# EAGLE board esquema_synesthesia (EAGLE 8.1.0)

Size 160 x 100 mm. Coordinates in mm from the lower left corner, seen from the top.
Outline: 0,0 160,0 160,100 0,100 0,0
Copper layers (1*16): Top 0.035mm / dielectric 1.5mm / Bottom 0.035mm
Design rules "default": minimum track width 10mil, minimum drill 24mil, track to track 8mil, track to pad 8mil, pad to pad 8mil, via to via 8mil, smd to smd 8mil, copper to edge 40mil, drill to drill 8mil, minimum pad ring 10mil, minimum via ring 8mil, stop-mask expansion 4mil, vias tented up to drill 0mil, thermal gap 10mil

## Footprints (pad centres in the part's own frame; a part is rotated, then mirrored left to right if it is on the bottom)
BT_BOARD_FOOTPRINT = drill 0.9 pad 1.778: GND -16.51,-1.27; RX -16.51,3.81; TX -16.51,1.27; VCC -16.51,-3.81
HC-SR04_FOOTPRINT = drill 0.9 pad 1.778: ECHO 0,1.27; TRIG 0,-1.27; VCC 0,-3.81 | drill 0.9 pad 1.778 square: GND 0,3.81
TACTILE_SWITCH_PTH_6.0MM = drill 1.016 pad 1.88: 1 -3.251,2.261; 2 3.251,2.261; 3 -3.251,-2.261; 4 3.251,-2.261
PRO-MINI = drill 0.8 long: A0 8.89,8.89; A1 8.89,11.43; A2 8.89,13.97; A3 8.89,16.51; A4 -2.54,-1.27; A5 0,-1.27; A6 2.54,-1.27; A7 5.08,-1.27; D2 -6.35,16.51; D3 -6.35,13.97; D4 -6.35,11.43; D5 -6.35,8.89; D6 -6.35,6.35; D7 -6.35,3.81; D8 -6.35,1.27; D9 -6.35,-1.27; D10 8.89,-1.27; D11 8.89,1.27; D12 8.89,3.81; D13 8.89,6.35; DTR 7.62,29.21; GND 8.89,24.13; GND1 -6.35,19.05; GND2 -5.08,29.21; GND3 -2.54,29.21; RAW 8.89,26.67; RST 8.89,21.59; RST1 -6.35,21.59; RX1 -6.35,24.13; RX1-1 2.54,29.21; TX0 -6.35,26.67; TX0-1 5.08,29.21; VCC 8.89,19.05; VCC1 0,29.21

## Placement (x,y rotation side)
J_BT_BOARD_1  BLUETOOTH_BOARD  [BT_BOARD_FOOTPRINT]  -30.48,43.18 0 top  (outside the outline)
J_ULTRASONIC_1  HC-SR04  [HC-SR04_FOOTPRINT]  -16.51,58.42 0 top  (outside the outline)
J_ULTRASONIC_2  HC-SR04  [HC-SR04_FOOTPRINT]  -24.13,58.42 0 top  (outside the outline)
J_ULTRASONIC_3  HC-SR04  [HC-SR04_FOOTPRINT]  -31.75,58.42 0 top  (outside the outline)
S1  MOMENTARY-SWITCH-SPST-PTH-6.0MM  [TACTILE_SWITCH_PTH_6.0MM]  -44.45,57.15 0 top  (outside the outline)
S2  MOMENTARY-SWITCH-SPST-PTH-6.0MM  [TACTILE_SWITCH_PTH_6.0MM]  -21.59,69.85 0 top  (outside the outline)
U$1  PRO-MINI  [PRO-MINI]  -24.13,3.81 0 top  (outside the outline)

## Library data of the parts
J_BT_BOARD_1 = Bluetooth HC-05
J_ULTRASONIC_1-J_ULTRASONIC_3 = Ultrasonic Sensor HC-SR04
S1 S2 = SparkFun-Switches; PROD_ID: SWCH-08441; SF_SKU: COM-00097
U$1 = Arduino-clone

## Nets
GND: U$1.GND
N$1: J_BT_BOARD_1.VCC J_ULTRASONIC_1.VCC J_ULTRASONIC_2.VCC J_ULTRASONIC_3.VCC U$1.VCC1
N$2: J_BT_BOARD_1.GND J_ULTRASONIC_1.GND J_ULTRASONIC_2.GND J_ULTRASONIC_3.GND S1.1 S2.1 U$1.GND2 U$1.GND3
N$3: J_ULTRASONIC_3.ECHO U$1.D4
N$4: J_ULTRASONIC_3.TRIG U$1.D5
N$5: J_ULTRASONIC_2.TRIG U$1.D7
N$6: J_ULTRASONIC_2.ECHO U$1.D6
N$7: J_ULTRASONIC_1.TRIG U$1.D9
N$8: J_ULTRASONIC_1.ECHO U$1.D8
N$9: J_BT_BOARD_1.RX U$1.TX0-1
N$10: J_BT_BOARD_1.TX U$1.RX1-1
N$13: S1.3 U$1.D2
N$14: S2.3 U$1.D3
VCC: U$1.RAW

## Tracks (layer width: path | path; a pad name or v marks a point on that pad's centre or on a via)
N$1  (4 unrouted)
N$2  (7 unrouted)
N$3  (1 unrouted)
N$4  (1 unrouted)
N$5  (1 unrouted)
N$6  (1 unrouted)
N$7  (1 unrouted)
N$8  (1 unrouted)
N$9  (1 unrouted)
N$10  (1 unrouted)
N$13  (1 unrouted)
N$14  (1 unrouted)